# EAGLE board EEGbreakout-board (EAGLE 6.5.0)
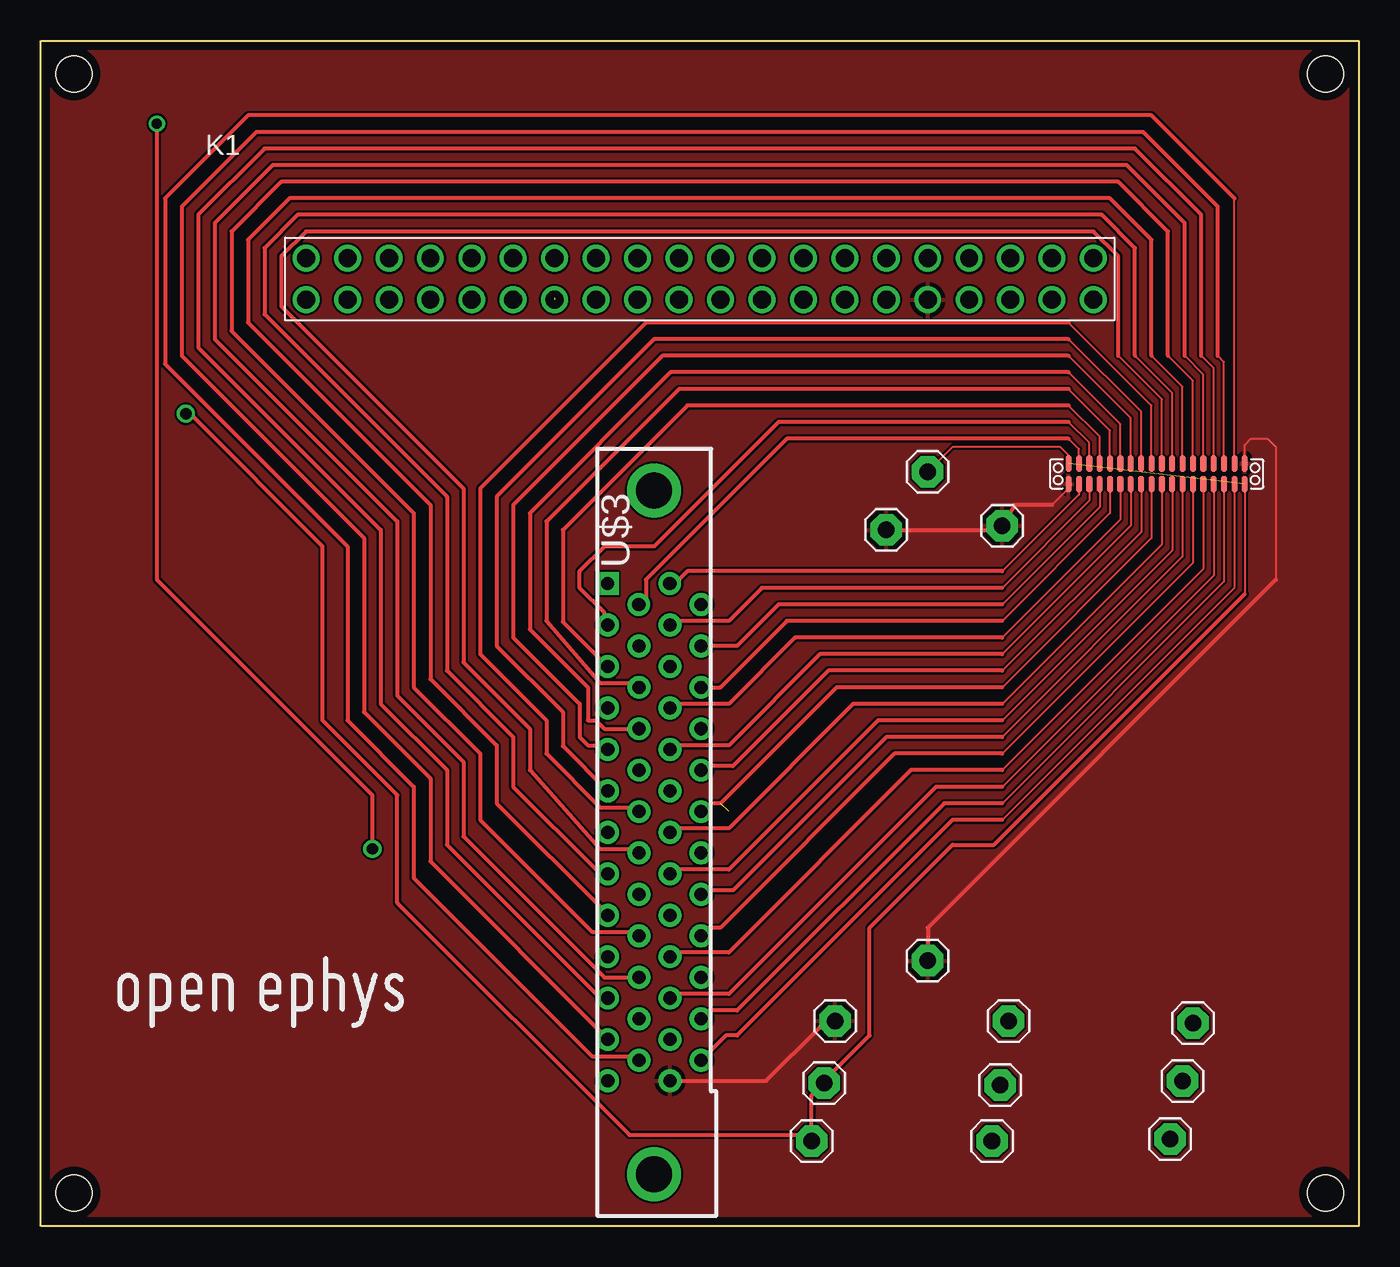
[diagram p0: board, top side]
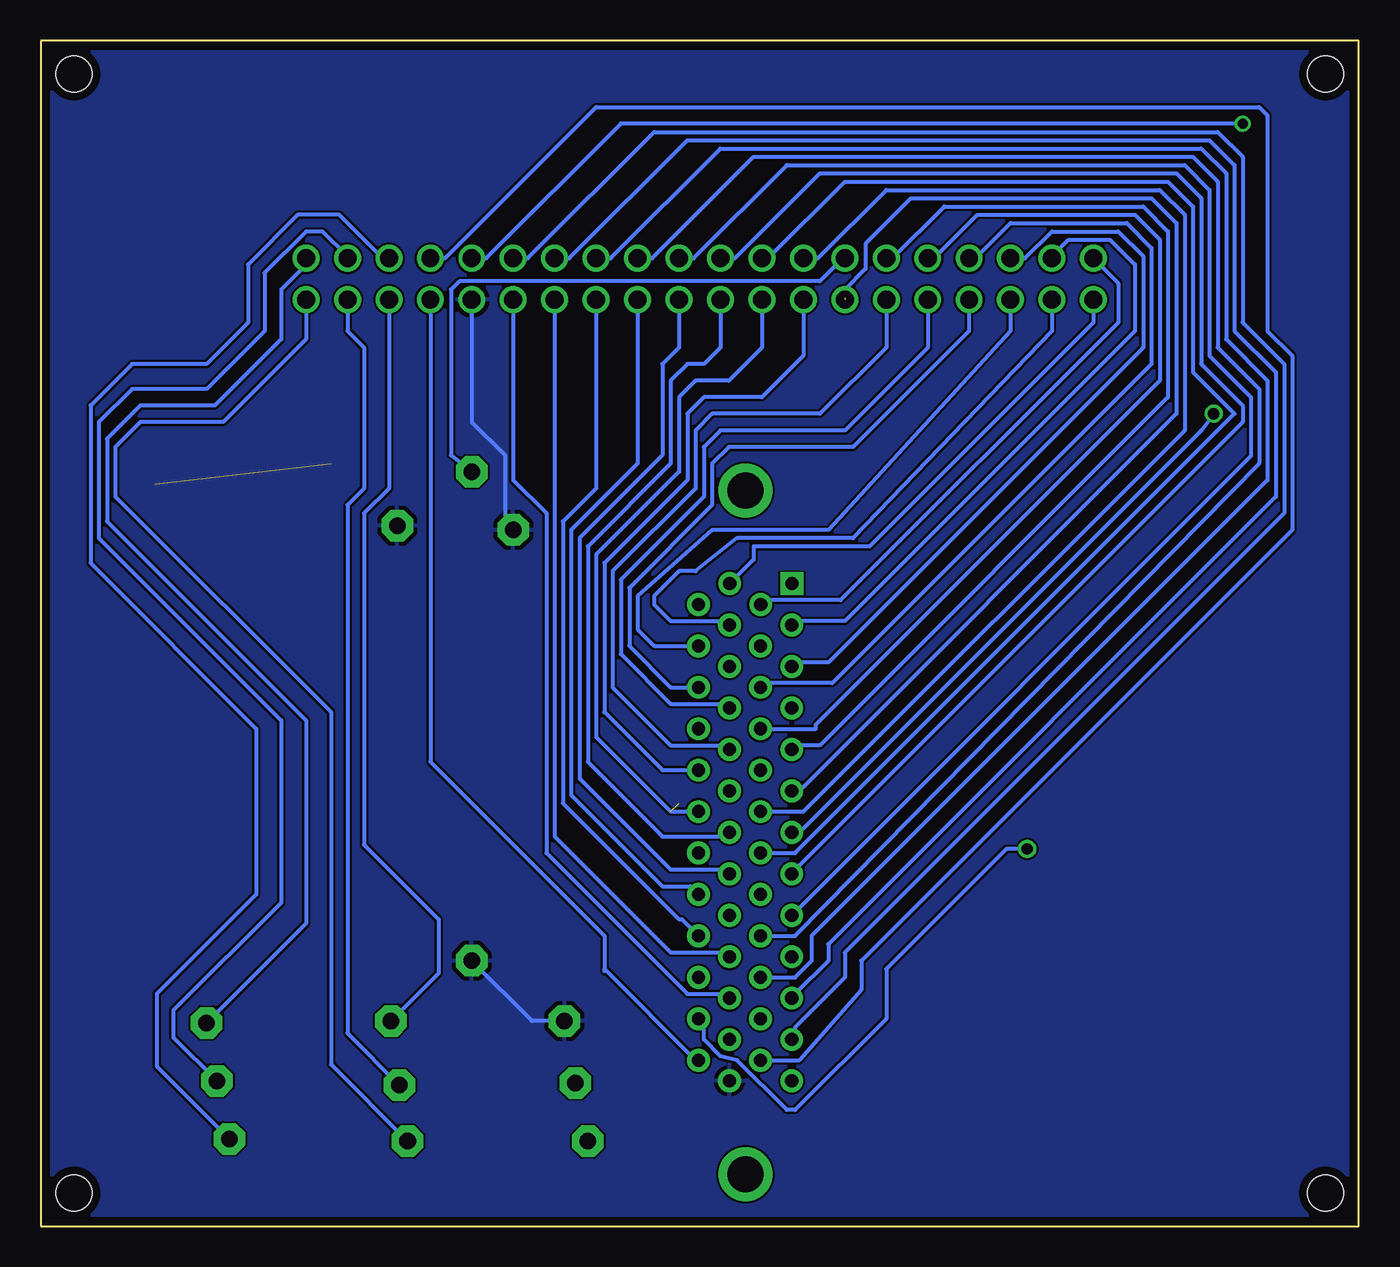
[diagram p1: board, bottom side, seen from below]

Size 80.77 x 72.64 mm. Coordinates in mm from the lower left corner, seen from the top.
Outline: 0,72.64 80.77,72.64 80.77,0 0,0 0,72.64
Copper layers (1*16): Top 0.0178mm / dielectric 59mil / Bottom 0.0178mm
Design rules "default *": minimum track width 5mil, minimum drill 14mil, track to track 5mil, track to pad 5mil, pad to pad 5mil, via to via 5mil, smd to smd 5mil, copper to edge 20mil, drill to drill 16mil, minimum pad ring 8mil, minimum via ring 8mil, stop-mask expansion 3mil, vias tented up to drill 0mil, thermal gap 10mil
Net classes: 0 default: width 0.127 mm, clearance 0.127 mm
Holes 2.2 mm at 2.03,70.61 78.74,70.61 78.74,2.03 2.03,2.03

## Footprints (pad centres in the part's own frame; a part is rotated, then mirrored left to right if it is on the bottom)
1X01 = drill 1.016 pad 1.93 octagon: 1 0,0
61304021121 = drill 1.1: 1 24.13,1.27; 2 21.59,1.27; 3 19.05,1.27; 4 16.51,1.27; 5 13.97,1.27; 6 11.43,1.27; 7 8.89,1.27; 8 6.35,1.27; 9 3.81,1.27; 10 1.27,1.27; 11 -1.27,1.27; 12 -3.81,1.27; 13 -6.35,1.27; 14 -8.89,1.27; 15 -11.43,1.27; 16 -13.97,1.27; 17 -16.51,1.27; 18 -19.05,1.27; 19 -21.59,1.27; 20 -24.13,1.27; 21 24.13,-1.27; 22 21.59,-1.27; 23 19.05,-1.27; 24 16.51,-1.27; 25 13.97,-1.27; 26 11.43,-1.27; 27 8.89,-1.27; 28 6.35,-1.27; 29 3.81,-1.27; 30 1.27,-1.27; 31 -1.27,-1.27; 32 -3.81,-1.27; 33 -6.35,-1.27; 34 -8.89,-1.27; 35 -11.43,-1.27; 36 -13.97,-1.27; 37 -16.51,-1.27; 38 -19.05,-1.27; 39 -21.59,-1.27; 40 -24.13,-1.27
NPD-36-VV-GS = smd 0.381 x 1.016: P$1 0,0; P$2 0.635,0; P$3 1.27,0; P$4 1.905,0; P$5 2.54,0; P$6 3.175,0; P$7 3.81,0; P$8 4.445,0; P$9 5.08,0; P$10 5.715,0; P$11 6.35,0; P$12 6.985,0; P$13 7.62,0; P$14 8.255,0; P$15 8.89,0; P$16 9.525,0; P$17 10.16,0; P$18 10.795,0; P$19 10.795,1.27; P$20 10.16,1.27; P$21 9.525,1.27; P$22 8.89,1.27; P$23 8.255,1.27; P$24 7.62,1.27; P$25 6.985,1.27; P$26 6.35,1.27; P$27 5.715,1.27; P$28 5.08,1.27; P$29 4.445,1.27; P$30 3.81,1.27; P$31 3.175,1.27; P$32 2.54,1.27; P$33 1.905,1.27; P$34 1.27,1.27; P$35 0.635,1.27; P$36 0,1.27
CON-MOLEX_71061-0003SM = drill 0.8 pad 1.4 square: 0 15.24,2.857 | drill 0.8 pad 1.4: 4 13.97,-2.873; 7 11.43,0.938; 10 10.16,-0.968; 13 7.62,2.842; 16 6.35,-2.873; 19 3.81,0.938; 22 2.54,-0.968; 28 -1.27,-2.873; 31 -3.81,0.938; 34 -5.08,-0.968; 37 -7.62,2.842; 40 -8.89,-2.873; 43 -11.43,0.938; 46 -12.7,-0.968; 49 -15.24,2.842; N1 -15.24,-0.968; P1 15.24,-0.958; P2 13.97,0.943; P3 12.7,2.842; P4 12.7,-0.968; P5 11.43,-2.873; P6 10.16,2.842; P7 8.89,0.938; P8 8.89,-2.873; P9 7.62,-0.968; P10 6.35,0.938; P11 5.08,2.842; P12 5.08,-0.968; P13 3.81,-2.873; P14 2.54,2.842; P15 1.27,0.938; P16 1.27,-2.873; P17 0,-0.968; P18 -1.27,0.938; P19 -2.54,2.842; P20 -2.54,-0.968; P21 -3.81,-2.873; P22 -5.08,2.842; P23 -6.35,0.938; P24 -6.35,-2.873; P25 -7.62,-0.968; P26 -8.89,0.938; P27 -10.16,2.842; P28 -10.16,-0.968; P29 -11.43,-2.873; P30 -12.7,2.842; P31 -13.97,0.938; P32 -13.97,-2.873; Z1 0,2.842 | drill 2.2 pad 2.6: Y1 20.955,0; Y2 -20.955,0

## Placement (x,y rotation side)
GND  [1X01]  58.93,42.93 0 top
JP1  [1X01]  58.29,5.21 0 top
JP2  [1X01]  58.8,8.64 0 top
JP3  [1X01]  59.31,12.57 0 top
JP4  [1X01]  69.22,5.33 0 top
JP5  [1X01]  69.98,8.89 0 top
JP6  [1X01]  70.61,12.45 0 top
JP7  [1X01]  51.82,42.67 0 top
JP8  [1X01]  48.68,12.57 180 top
JP9  [1X01]  54.36,16.26 0 top
JP10  [1X01]  54.36,46.23 0 top
JP11  [1X01]  47.24,5.21 0 top
JP12  [1X01]  48.01,8.76 0 top
K1  61304021121  [61304021121]  40.39,58.04 0 top
U$1  [OPEN_EPHYS_LOGO]  4.06,11.68 0 top
U$2  NPD-36-VV-GS  [NPD-36-VV-GS]  62.99,45.47 0 top
U$3  EZCF  [CON-MOLEX_71061-0003SM]  37.59,24.13 90 top

## Library data of the parts
GND JP1-JP12 = adafruit
K1 = Wuerth_Elektronik_eiCan_01_Pin__Socked_Headers_v1_3
U$1 U$2 = open-ephys
U$3 = MS001-1_4xNutzEURO

## Nets
GND: GND.1 JP7.1 JP8.1 JP9.1 K1.25 U$2.P$1 U$2.P$19 U$3.N1
N$1: JP6.1 K1.1
N$2: JP5.1 K1.2
N$3: JP4.1 K1.3
N$18: JP3.1 K1.23
N$19: JP2.1 K1.22
N$20: JP1.1 K1.21
N$76: K1.20 U$2.P$35 U$3.P2
N$77: K1.19 U$2.P$34 U$3.P3
N$78: K1.18 U$2.P$33 U$3.P6
N$79: K1.17 U$2.P$32 U$3.P7
N$80: K1.16 U$2.P$31 U$3.P10
N$81: K1.15 U$2.P$30 U$3.P11
N$82: K1.34 U$2.P$29 U$3.P14
N$83: K1.13 U$2.P$28 U$3.P15
N$84: K1.12 U$2.P$27 U$3.P18
N$85: K1.11 U$2.P$26 U$3.P19
N$86: K1.10 U$2.P$25 U$3.P22
N$87: K1.9 U$2.P$24 U$3.P23
N$88: K1.8 U$2.P$23 U$3.P26
N$89: K1.7 U$2.P$22 U$3.P27
N$90: K1.6 U$2.P$21 U$3.P30
N$91: K1.4 U$2.P$20 U$3.P31
N$94: K1.24 U$2.P$17 U$3.P32
N$95: K1.5 U$2.P$16 U$3.P29
N$96: K1.26 U$2.P$15 U$3.P28
N$97: K1.27 U$2.P$14 U$3.P25
N$98: K1.28 U$2.P$13 U$3.P24
N$99: K1.29 U$2.P$12 U$3.P21
N$100: K1.30 U$2.P$11 U$3.P20
N$101: K1.31 U$2.P$10 U$3.P17
N$102: K1.32 U$2.P$9 U$3.P16
N$103: K1.33 U$2.P$8 U$3.P13
N$104: K1.35 U$2.P$7 U$3.P12
N$105: K1.36 U$2.P$6 U$3.P9
N$106: K1.37 U$2.P$5 U$3.P8
N$107: K1.38 U$2.P$4 U$3.P5
N$108: K1.39 U$2.P$3 U$3.P4
N$109: K1.40 U$2.P$2 U$3.P1
REF: JP10.1 JP11.1 JP12.1 K1.14 U$2.P$18 U$2.P$36 U$3.Z1

## Tracks (layer width: path | path; a pad name or v marks a point on that pad's centre or on a via)
GND
  Top 0.127: U$2.P$1 62.99,45.21 61.98,44.2 | U$2.P$19 73.79,47.88 74.17,48.26 75.18,48.26 75.69,47.75 75.69,39.62
  Top 0.254: 61.98,44.2 59.69,44.2 GND.1 58.67,42.67 JP7.1 | U$3.N1 44.45,8.89 47.75,12.19 48.3,12.19 JP8.1 | 75.69,39.62 54.36,18.29 JP9.1
  Bottom 0.254: K1.25 54.36,49.28 52.32,47.24 52.32,43.18 JP7.1 | JP8.1 50.67,12.57 JP9.1
  pour Top: -0.51,73.15 81.28,73.15 81.28,-0.51 -0.51,-0.51
  pour Bottom: -0.51,73.15 -0.51,-0.51 81.28,-0.51 81.28,73.15
N$1
  Bottom 0.254: K1.1 64.52,58.93 66.04,57.4 66.04,54.36 70.1,50.29 74.68,50.29 76.71,48.26 76.71,43.18 64.52,30.99 64.52,18.54 JP6.1
N$2
  Bottom 0.254: K1.2 61.98,59.44 63.5,60.96 64.52,60.96 67.06,58.42 67.06,54.86 70.61,51.31 75.18,51.31 77.22,49.28 77.22,42.16 66.04,30.99 66.04,19.81 72.64,13.21 72.64,11.56 JP5.1
N$3
  Bottom 0.254: K1.3 59.82,59.31 62.48,61.98 65.02,61.98 68.07,58.93 68.07,55.37 70.61,52.83 75.18,52.83 77.72,50.29 77.72,40.64 67.56,30.48 67.56,20.32 73.66,14.22 73.66,9.78 JP4.1
N$18
  Bottom 0.254: K1.23 59.44,45.21 60.96,43.69 60.96,23.37 56.39,18.8 56.39,15.49 JP3.1
N$19
  Bottom 0.254: K1.22 61.98,54.86 60.96,53.85 60.96,45.21 61.98,44.2 61.98,11.81 JP2.1
N$20
  Bottom 0.254: K1.21 64.52,54.36 69.6,49.28 74.68,49.28 76.2,47.75 76.2,44.7 62.99,31.5 62.99,9.91 JP1.1
N$76
  Top 0.127: U$2.P$35 63.63,47.62 62.99,48.26
  Top 0.254: 62.99,48.26 45.72,48.26 37.08,39.62 37.08,38.48 37.03,38.48 U$3.P2
  Bottom 0.254: K1.20 14.73,57.78 14.73,55.37 31.75,38.35 36.65,38.35 U$3.P2
N$77
  Top 0.127: U$2.P$34 64.26,48.01 62.99,49.28
  Top 0.254: 62.99,49.28 45.21,49.28 37.59,41.66 34.54,41.66 33.02,40.13 33.02,39.12 34.54,37.59 34.54,37.04 U$3.P3
  Bottom 0.254: K1.19 18.8,59.44 17.78,60.45 15.24,60.45 13.72,58.93 13.72,54.86 31.5,37.08 34.75,37.08 U$3.P3
N$78
  Top 0.127: U$2.P$33 64.9,48.39 62.99,50.29
  Top 0.254: 62.99,50.29 39.62,50.29 32,42.67 32,37.04 U$3.P6
  Bottom 0.254: K1.18 20.45,59.31 18.8,60.96 14.73,60.96 13.21,59.44 13.21,53.85 32.51,34.54 34.75,34.54 U$3.P6
N$79
  Top 0.127: U$2.P$32 65.53,48.77 62.99,51.31
  Top 0.254: 62.99,51.31 39.12,51.31 30.99,43.18 30.99,37.08 34.29,33.27 36.4,33.27 U$3.P7
  Bottom 0.254: K1.17 23.5,59.31 21.34,61.47 14.22,61.47 12.7,59.94 12.7,52.83 32.26,33.27 36.66,33.27 U$3.P7
N$80
  Top 0.127: U$2.P$31 66.17,49.15 62.99,52.32
  Top 0.254: 62.99,52.32 38.61,52.32 29.97,43.69 29.97,36.58 33.53,33.02 33.53,30.99 34.04,30.99 34.54,30.48 U$3.P10
  Bottom 0.254: K1.16 26.04,59.31 23.37,61.98 13.72,61.98 12.19,60.45 12.19,51.82 33.27,30.73 33.27,30.48 U$3.P10
N$81
  Top 0.127: U$2.P$30 66.8,49.53 62.99,53.34
  Top 0.254: 62.99,53.34 38.1,53.34 28.96,44.2 28.96,36.07 33.02,32 33.02,29.97 33.53,29.46 34.5,29.46 U$3.P11 34.54,29.42 34.54,29.46
  Bottom 0.254: K1.15 28.58,59.31 25.4,62.48 13.21,62.48 11.68,60.96 11.68,50.8 33.02,29.46 34.75,29.46 U$3.P11
N$82  (1 unrouted)
  Top 0.127: U$2.P$29 67.44,49.91 62.99,54.36
  Top 0.254: 62.99,54.36 37.59,54.36 27.94,44.7 27.94,35.56 32,31.5 32,29.42 U$3.P14
  Bottom 0.254: U$3.P14 34.29,26.67 11.18,49.78 11.18,61.47 12.7,62.99 27.43,62.99 30.23,60.2 30.23,58.67 31.5,57.4 31.5,56.9
N$83
  Top 0.127: U$2.P$28 68.07,50.29 62.99,55.37
  Top 0.254: 62.99,55.37 37.08,55.37 26.92,45.21 26.92,35.05 30.99,30.99 30.99,28.96 34.29,25.65 36.4,25.65 U$3.P15
  Bottom 0.254: K1.13 33.15,59.31 28.96,63.5 12.19,63.5 10.67,61.98 10.67,48.77 34.04,25.4 U$3.P15
N$84
  Top 0.127: U$2.P$27 68.71,50.67 66.04,53.34
  Top 0.254: 66.04,53.34 66.04,59.44 64.52,60.96 16.26,60.96 14.73,59.44 14.73,56.39 25.91,45.21 25.91,34.54 29.97,30.48 29.97,27.94 34.29,23.11 36.4,23.11 U$3.P18
  Bottom 0.254: K1.12 36.2,59.31 31.5,64.01 11.68,64.01 10.16,62.48 10.16,52.32 7.62,49.78 34.54,22.86 U$3.P18
N$85
  Top 0.127: U$2.P$26 69.34,51.05 67.06,53.34
  Top 0.254: 67.06,53.34 67.06,59.94 65.02,61.98 15.75,61.98 13.72,59.94 13.72,55.88 24.89,44.7 24.89,34.04 28.96,29.97 28.96,26.92 34.04,21.84 34.5,21.84 U$3.P19
  Bottom 0.254: K1.11 38.23,59.31 33.02,64.52 11.18,64.52 9.65,62.99 9.65,52.83 7.11,50.29 7.11,49.28 34.75,21.64 U$3.P19
N$86
  Top 0.127: U$2.P$25 69.98,51.44 68.07,53.34
  Top 0.254: 68.07,53.34 68.07,60.45 65.53,62.99 15.24,62.99 12.7,60.45 12.7,55.37 23.88,44.2 23.88,33.53 27.94,29.46 27.94,25.91 34.54,19.3 34.54,19.26 U$3.P22
  Bottom 0.254: K1.10 40.77,59.31 35.05,65.02 10.67,65.02 9.14,63.5 9.14,53.34 6.6,50.8 6.6,47.19 U$3.P22
N$87
  Top 0.127: U$2.P$24 70.61,51.82 69.09,53.34
  Top 0.254: 69.09,53.34 69.09,60.96 66.04,64.01 14.73,64.01 11.68,60.96 11.68,54.86 22.86,43.69 22.86,33.02 26.92,28.96 26.92,24.89 33.78,18.03 36.4,18.03 U$3.P23
  Bottom 0.254: K1.9 43.31,59.31 37.08,65.53 10.16,65.53 8.64,64.01 8.64,53.85 6.1,51.31 6.1,46.74 34.54,17.78 U$3.P23
N$88
  Top 0.127: U$2.P$23 71.25,52.2 70.1,53.34
  Top 0.254: 70.1,53.34 70.1,61.47 66.55,65.02 14.22,65.02 10.67,61.47 10.67,54.36 21.84,43.18 21.84,32.51 25.91,28.45 25.91,23.88 34.54,15.24 U$3.P26
  Bottom 0.254: K1.8 45.85,59.31 39.12,66.04 9.65,66.04 8.13,64.52 8.13,54.36 5.59,51.82 5.59,45.72 33.53,17.78 33.53,16.26 34.54,15.24 U$3.P26
N$89
  Top 0.127: U$2.P$22 71.88,52.58 71.12,53.34
  Top 0.254: 71.12,53.34 71.12,61.98 67.06,66.04 13.72,66.04 9.65,61.98 9.65,53.85 20.83,42.67 20.83,32 24.89,27.94 24.89,23.37 34.04,14.22 34.5,14.22 | 34.5,14.22 U$3.P27 | 34.5,14.22 34.54,14.22 35.05,13.72
  Bottom 0.254: K1.7 48.39,59.31 41.15,66.55 9.14,66.55 7.62,65.02 7.62,54.86 5.08,52.32 5.08,44.7 32.51,17.27 32.51,16.26 34.54,14.22 34.54,14.18 U$3.P27
N$90
  Top 0.127: U$2.P$21 72.52,52.96 72.14,53.34
  Top 0.254: 72.14,53.34 72.14,62.48 67.56,67.06 13.21,67.06 8.64,62.48 8.64,53.34 19.81,42.16 19.81,31.5 23.88,27.43 23.88,22.35 34.75,11.48 U$3.P30
  Bottom 0.254: K1.6 50.93,59.31 43.18,67.06 8.64,67.06 7.11,65.53 7.11,55.37 4.57,52.83 4.57,43.69 31.5,16.76 31.5,15.24 34.54,12.19 34.54,11.64 U$3.P30
N$91
  Top 0.127: U$2.P$20 73.15,62.99
  Top 0.254: 73.15,62.99 68.07,68.07 12.7,68.07 7.62,62.99 7.62,52.83 18.8,41.66 18.8,30.99 22.86,26.92 22.86,21.34 33.78,10.41 36.4,10.41 U$3.P31
  Bottom 0.254: K1.4 56.01,59.31 46.74,68.58 6.1,68.58 5.59,68.07 5.59,54.86 4.06,53.34 4.06,42.67 30.48,16.26 30.48,14.48 34.29,10.16 U$3.P31
N$94
  Top 0.127: U$2.P$17 73.15,39.12 58.93,24.89
  Top 0.254: 58.93,24.89 55.88,24.89 42.67,11.68 41.99,11.68 U$3.P32
  Bottom 0.254: 46.23,15.75 46.23,17.78 56.9,28.45 K1.24 | 46.23,15.75 46.23,15.62 | U$3.P32 40.64,10.16 46.23,15.75
N$95  (via drill 0.6, 0.7)
  Top 0.127: U$2.P$16 72.52,39.5 58.93,25.91
  Top 0.254: 58.93,25.91 55.37,25.91 42.67,13.21 40.97,13.21 U$3.P29 | v7.11,67.56 7.11,39.62 20.32,26.42 v20.32,23.11
  Bottom 0.254: v7.11,67.56 45.21,67.56 53.47,59.31 K1.5 | v20.32,23.11 21.59,23.11 28.96,15.75 28.96,12.7 34.54,7.11 35.05,7.11 38.1,10.16 39.12,10.41 40.13,11.43 40.13,12.37 U$3.P29
N$96
  Top 0.127: U$2.P$15 71.88,39.88 58.93,26.92
  Top 0.254: 58.93,26.92 54.86,26.92 42.16,14.22 38.81,14.22 U$3.P28
  Bottom 0.254: K1.26 51.82,45.72 49.78,43.69 49.78,22.86 41.15,14.22 38.81,14.22 U$3.P28
N$97
  Top 0.127: U$2.P$14 71.25,40.26 58.93,27.94
  Top 0.254: 58.93,27.94 53.34,27.94 42.16,16.76 38.81,16.76 U$3.P25
  Bottom 0.254: K1.27 49.28,23.88 42.16,16.76 38.81,16.76 U$3.P25
N$98
  Top 0.127: U$2.P$13 70.61,40.64 58.93,28.96
  Top 0.254: 58.93,28.96 52.32,28.96 41.66,18.29 40.97,18.29 U$3.P24
  Bottom 0.254: K1.28 46.74,45.21 48.77,43.18 48.77,25.91 41.66,18.8 41.48,18.8 U$3.P24
N$99
  Top 0.127: U$2.P$12 69.98,41.02 58.93,29.97
  Top 0.254: 58.93,29.97 51.82,29.97 42.42,20.57 40.72,20.57 U$3.P21
  Bottom 0.254: K1.29 44.2,46.74 48.26,42.67 48.26,26.42 42.67,20.83 40.97,20.83 U$3.P21
N$100
  Top 0.127: U$2.P$11 69.34,41.4 58.93,30.99
  Top 0.254: 58.93,30.99 51.31,30.99 42.16,21.84 38.81,21.84 U$3.P20
  Bottom 0.254: K1.30 41.66,53.85 42.67,52.83 42.67,47.24 47.75,42.16 47.75,27.43 42.16,21.84 38.81,21.84 U$3.P20
N$101
  Top 0.127: U$2.P$10 68.71,41.78 58.93,32
  Top 0.254: 58.93,32 49.78,32 42.16,24.38 38.81,24.38 U$3.P17
  Bottom 0.254: K1.31 39.12,53.85 40.13,52.83 41.15,52.83 42.16,51.82 42.16,46.74 47.24,41.66 47.24,28.45 42.67,23.88 38.81,23.88 U$3.P17
N$102  (1 unrouted)
  Top 0.127: U$2.P$9 68.07,42.16 58.93,33.02
  Top 0.254: 58.93,33.02 48.77,33.02 41.66,25.91 41.27,25.91
  Bottom 0.254: K1.32 36.58,53.85 38.61,51.82 40.64,51.82 41.66,50.8 41.66,46.23 46.74,41.15 46.74,29.97 42.16,25.4 U$3.P16
N$103
  Top 0.127: U$2.P$8 67.44,42.55 58.93,34.04
  Top 0.254: 58.93,34.04 48.26,34.04 42.42,28.19 40.72,28.19 U$3.P13
  Bottom 0.254: K1.33 34.04,53.34 36.58,50.8 40.13,50.8 41.15,49.78 41.15,45.72 46.23,40.64 46.23,31.5 42.67,27.94 U$3.P13
N$104
  Top 0.127: U$2.P$7 66.8,42.93 58.93,35.05
  Top 0.254: 58.93,35.05 47.75,35.05 42.16,29.46 38.81,29.46 U$3.P12
  Bottom 0.254: K1.35 28.96,53.85 33.02,49.78 39.62,49.78 40.64,48.77 40.64,45.21 45.72,40.13 45.72,33.02 42.16,29.46 38.81,29.46 U$3.P12
N$105
  Top 0.127: U$2.P$6 66.17,43.31 58.93,36.07
  Top 0.254: 58.93,36.07 46.23,36.07 42.16,32 38.81,32 U$3.P9
  Bottom 0.254: K1.36 26.42,53.85 31.5,48.77 39.12,48.77 40.13,47.75 40.13,44.7 45.21,39.62 45.21,35.05 42.16,32 38.81,32 U$3.P9
N$106
  Top 0.127: U$2.P$5 65.53,43.69 58.93,37.08
  Top 0.254: 58.93,37.08 45.72,37.08 41.66,33.02 U$3.P8
  Bottom 0.254: K1.37 23.88,54.86 30.99,47.75 38.61,47.75 39.62,46.74 39.62,44.2 44.7,39.12 44.7,35.56 42.16,33.02 U$3.P8
N$107
  Top 0.127: U$2.P$4 64.9,44.07 58.93,38.1
  Top 0.254: 58.93,38.1 45.21,38.1 42.67,35.56 U$3.P5
  Bottom 0.254: K1.38 21.34,54.86 32.51,42.67 39.62,42.67 44.2,38.61 44.2,36.58 43.18,35.56 U$3.P5
N$108
  Top 0.127: U$2.P$3 64.26,44.45 58.93,39.12
  Top 0.254: 58.93,39.12 44.2,39.12 42.16,37.08 38.81,37.08 U$3.P4
  Bottom 0.254: K1.39 18.8,54.86 30.99,42.16 38.1,42.16 40.64,40.13 41.66,40.13 43.18,38.61 43.18,38.1 42.16,37.08 38.56,37.08 U$3.P4
N$109
  Top 0.127: U$2.P$2 63.63,44.83 58.93,40.13
  Top 0.254: 58.93,40.13 39.62,40.13 39.12,39.62 38.8,39.62 U$3.P1
  Bottom 0.254: K1.40 16.26,55.37 29.97,41.66 37.08,41.66 37.08,40.83 U$3.P1
REF  (via drill 0.7)  (1 unrouted)
  Top 0.127: U$2.P$18 73.79,38.73 | U$2.P$36 62.99,47.24 62.48,47.75 55.88,47.75 JP10.1
  Top 0.254: 73.79,38.73 58.42,23.37 55.88,23.37 50.8,18.29 50.8,11.68 48.01,8.89 JP12.1 47.24,8 JP11.1 46.86,5.59 36.07,5.59 21.84,19.81 21.84,26.42 17.27,30.99 17.27,41.66 9.14,49.78 v8.89,49.78
  Bottom 0.254: U$3.Z1 34.29,24.13 9.65,48.77 v8.89,49.78 | K1.14 31.62,59.31 33.02,57.91 55.12,57.91 55.63,57.4 55.63,47.24 JP10.1

## Text on the board
tDocu: 40 PIN | BLACK WIRES | P50 | OMNETICS | REF | GND | GND | GND | GND | FP1 | VEOU | EEG breakout board | REF | HEOR | HEOL | version 1.0, January 2014 design at open-ephys.com | X | REF | VEOL